# EAGLE board PK_MUV_sw (EAGLE 9.1.3)
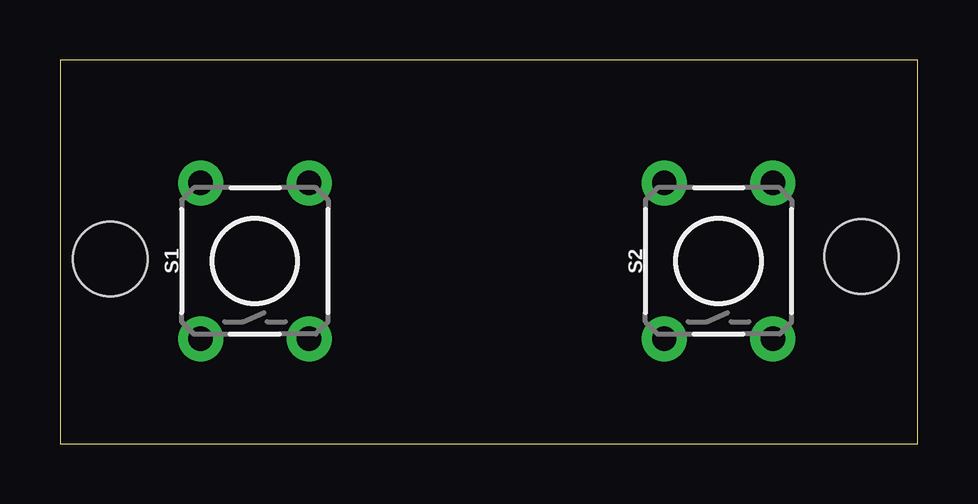
[diagram p0: board, top side]
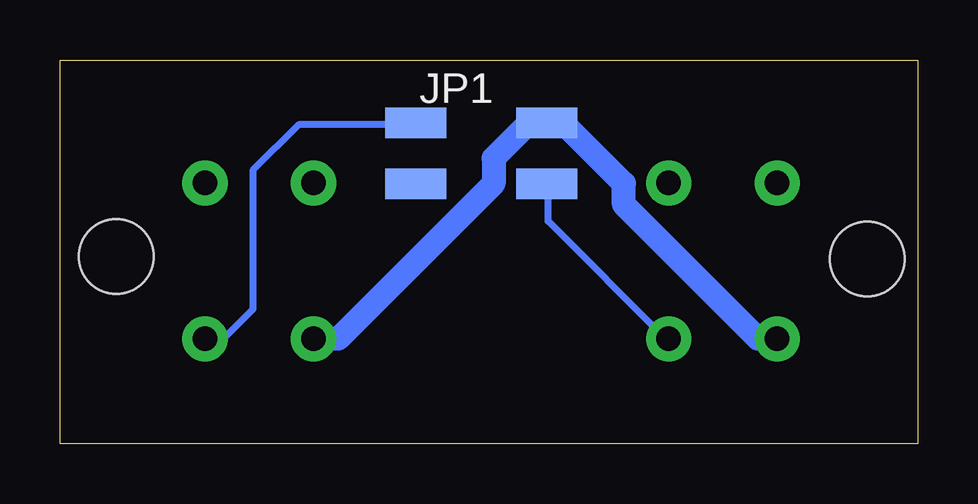
[diagram p1: board, bottom side, seen from below]

Size 35.74 x 16 mm. Coordinates in mm from the lower left corner, seen from the top.
Outline: 0,0 35.74,0 35.74,16 0,16 0,0
Copper layers (1*16): Top 0.035mm / dielectric 1.5mm / Bottom 0.035mm
Design rules "default *": minimum track width 6mil, minimum drill 0.35mm, track to track 0.4mm, track to pad 0.4mm, pad to pad 0.4mm, via to via 0.4mm, smd to smd 0.4mm, copper to edge 40mil, drill to drill 6mil, minimum pad ring 10mil, minimum via ring 8mil, stop-mask expansion 4mil, vias tented up to drill 0mil, thermal gap 10mil
Net classes: 0 default: width 0.3 mm, clearance 0.4 mm; 1 power: width 1 mm, clearance 0.4 mm
Holes 3.1 mm at 2.1,7.7 33.4,7.8

## Footprints (pad centres in the part's own frame; a part is rotated, then mirrored left to right if it is on the bottom)
2X02SMD = smd 2.54 x 1.27: 1 -2.54,1.27; 2 2.92,1.27; 3 -2.54,-1.27; 4 2.92,-1.27
TACTILE_SWITCH_PTH_6.0MM_KIT = drill 1.016 pad 1.88: 1 -3.251,2.261; 2 3.251,2.261; 3 -3.251,-2.261; 4 3.251,-2.261

## Placement (x,y rotation side)
JP1  PINHD-2X2-SMD  [2X02SMD]  18,12.1 180 bottom
S1  MOMENTARY-SWITCH-SPST-PTH-6.0MM-KIT  [TACTILE_SWITCH_PTH_6.0MM_KIT]  8.12,7.62 90 top
S2  MOMENTARY-SWITCH-SPST-PTH-6.0MM-KIT  [TACTILE_SWITCH_PTH_6.0MM_KIT]  27.44,7.62 90 top

## Library data of the parts
JP1 = fab
S1 S2 = SparkFun-Switches; PROD_ID: SWCH-08441; SF_SKU: COM-00097

## Nets
CONF: JP1.1 S1.3
GND [power]: JP1.3 S1.1 S2.1
RST: JP1.4 S2.3

## Tracks (layer width: path | path; a pad name or v marks a point on that pad's centre or on a via)
CONF
  Bottom 0.3: JP1.1 15.4,10.68 15.4,9.28 10.5,4.38 S1.3
GND
  Bottom 1: S1.1 5.95,4.38 6.65,4.38 12.25,9.97 12.25,10.85 14.7,13.3 15.4,13.3 JP1.3 15.93,13.3 16.27,13.3 17.68,11.9 17.68,10.85 24.15,4.38 25.02,4.38 S2.1
RST
  Bottom 0.3: JP1.4 21,13.3 25.8,13.3 27.7,11.4 27.7,5.6 29.1,4.2 29.57,4.2 S2.3